# Altium PCB PCB1.PcbDoc (part 1 of 3)
Units mm, origin at the board's own origin, x right, y up, seen from the top; angles counter-clockwise.
Board outline 21.72 x 226.57 mm, 2 copper layers (Top Layer, Bottom Layer); 37 components, 26 nets, 124 pads, 11 vias.
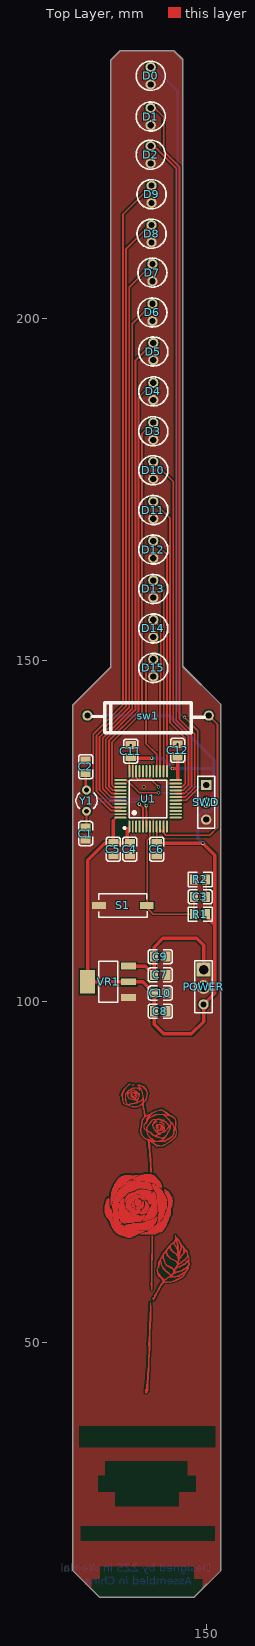
[diagram p0: Top Layer view]
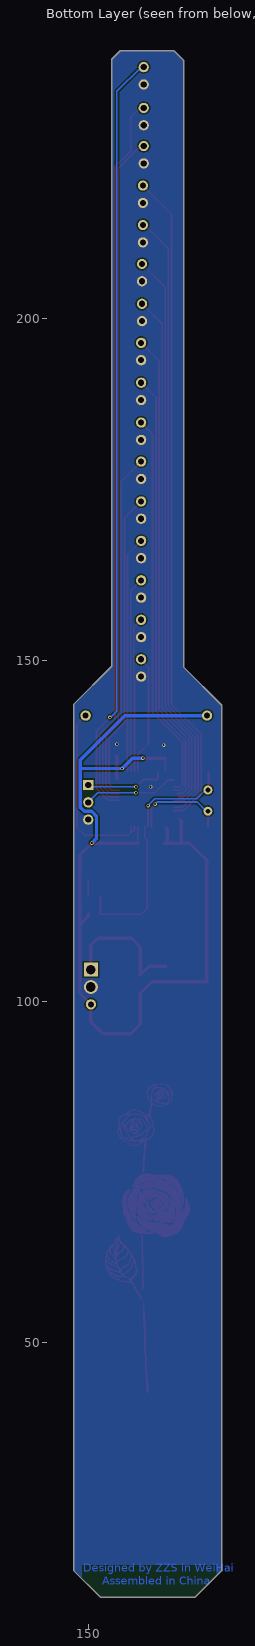
[diagram p1: Bottom Layer view, seen from below]

## Layer stack, top to bottom
Top Solder: solder mask 0.0102, Solder Resist, Dk 3.5
Top Layer: signal copper 0.0356
Dielectric 1: dielectric 0.32, FR-4, Dk 4.8
Bottom Layer: signal copper 0.0356
Bottom Solder: solder mask 0.0102, Solder Resist, Dk 3.5

## Board outline
130.429,16.637 130.429,143.383 136.017,148.971 136.017,237.871 137.414,239.268 145.288,239.268 146.558,237.998 146.558,149.098 152.146,143.51 152.146,16.637 148.209,12.7 134.366,12.7

## Design rules (kind name [scope] priority, off if disabled: settings)
Clearance [All] p1: gap=0.203
PolygonConnect [All] p1: connectstyle=Direct reliefconductorwidth=0.254 reliefentries=4 polygonreliefangle="90 Angle" airgapwidth=0.254
RoutingVias [All] p1: holewidth=0.305 width=0.508 viastyle="Through Hole" minholewidth=0.305 minwidth=0.508 maxholewidth=0.305 maxwidth=0.508
SolderMaskExpansion [All] p1: expansion=0.102
UnpouredPolygon [All] p1: allowunpoured=FALSE
Width [All] p1: maxlimit=0.508 minlimit=2539.975 preferedwidth=0.254 toplayer_minwidth=0 bottomlayer_minwidth=0 minimp=50.000000 maximp=50.000000 favimp=50.000000
29 further rules are at their usual default settings.

## Components (designator, comment, footprint, x,y, rotation, side; value= is the part's Value field where it differs from the comment)
C1 "20pF" 0805_C 132.334,124.587 r270 top
C2 "20pF" 0805_C 132.334,134.366 r90 top
C3 "100nF(104) 10% 50V" 0805_C 149.098,115.316 r0 top
C4 "104" 0805_C 138.811,122.301 r90 top
C5 "104" 0805_C 136.398,122.301 r90 top
C6 "104" 0805_C 142.748,122.301 r90 top
C7 "100nF" 0805_C 143.256,103.886 r180 top
C8 "100nF" 0805_C 143.256,98.552 r180 top
C9 "10uF" 0805_C 143.256,106.553 r0 top
C10 "10uF" 0805_C 143.256,101.219 r0 top
C11 "104" 0805_C 138.938,136.652 r270 top
C12 "104" 0805_C 145.796,136.779 r270 top
D0 "LED" PCBComponent_1 141.859,235.585 r90 top
D1 "LED" PCBComponent_1 141.859,229.616 r90 top
D2 "LED" PCBComponent_1 141.859,224.028 r90 top
D3 "LED" PCBComponent_1 142.24,183.515 r90 top
D4 "LED" PCBComponent_1 142.24,189.357 r90 top
D5 "LED" PCBComponent_1 142.24,195.199 r90 top
D6 "LED" PCBComponent_1 142.113,200.914 r90 top
D7 "LED" PCBComponent_1 142.113,206.756 r90 top
D8 "LED" PCBComponent_1 141.986,212.454 r90 top
D9 "LED" PCBComponent_1 141.986,218.237 r90 top
D10 "LED" PCBComponent_1 142.24,177.8 r90 top
D11 "LED" PCBComponent_1 142.24,171.975 r90 top
D12 "LED" PCBComponent_1 142.24,166.192 r90 top
D13 "LED" PCBComponent_1 142.24,160.409 r90 top
D14 "LED" PCBComponent_1 142.24,154.627 r90 top
D15 "LED" PCBComponent_1 142.24,148.844 r90 top
POWER "Header 3" HDR1X3#1 149.606,104.648 r270 top (schematic designator POWER1)
R1 "10KΩ (1002) ±1%" 0805_R 149.098,112.776 r180 top
R2 "100R" 0805_R 149.098,117.856 r0 top
S1 "SW-PB" KEY_3*6 137.795,114.046 r0 top
sw1 "SW" "PCBComponent_1 - duplicate" 141.478,141.859 r0 top
SWD "Header 3" HDR1X3#2 149.987,131.699 r270 top (schematic designator DOWNLOAD)
U1 "STM32F103C8T6" LQFP-48_7x7x05P 141.478,129.667 r0 top
VR1 "AMS1117-3.3" SOT-223 135.636,102.87 r0 top
Y1 "XTAL" BCY-W2/D3.1 132.461,129.413 r0 top

## Footprints (in the part's own frame and the unit in brackets; to place one, negate y for a bottom-side part, rotate by r counter-clockwise, add the part's x,y. Pads: shape width x height; smd on the part's side, far side on the other; paste and mask are expansions set on the pad)
0805_C [mm]
  rect 1.16x1.47 smd: 1(-0.89,0) 2(0.89,0)
  silkscreen extent -1.77,-1.04 1.77,1.04, body extent -1,-0.62 1,0.63, height 0.77
0805_R [mm]
  rect 1.16x1.47 smd: 1(-0.89,0) 2(0.89,0)
  silkscreen extent -1.77,-1.03 1.77,1.03, body extent -1,-0.62 1,0.63, height 0.49
BCY-W2/D3.1 [mm]
  round 1.3 hole 0.7: 1(0,1.55) 2(0,-1.55)
  silkscreen extent -1.55,-1.19 1.55,1.17
HDR1X3#1 [mil]
  rect 80x80 hole 55: 1(0,0)
  round 80 hole 55: 2(100,0)
  round 59.06 hole 35.43: 3(200,0)
  silkscreen extent -50,-50 250,50
HDR1X3#2 [mil]
  rect 59.06x59.06 hole 35.43: 1(0,0)
  round 59.06 hole 35.43: 2(100,0) 3(200,0)
  silkscreen extent -50,-50 250,50
KEY_3*6 [mm]
  rect 2x1 smd: 0(-3.5,0) 1(3.5,0)
  silkscreen extent -3.58,-1.75 3.56,1.75
LQFP-48_7x7x05P [mm]
  oval 0.28x1.8 smd mask+0.051: 1(-2.75,-4.05) 2(-2.25,-4.05) 3(-1.75,-4.05) 4(-1.25,-4.05) 5(-0.75,-4.05) 6(-0.25,-4.05) 7(0.25,-4.05) 8(0.75,-4.05) 9(1.25,-4.05) 10(1.75,-4.05) 11(2.25,-4.05) 12(2.75,-4.05) 25(2.75,4.05) 26(2.25,4.05) 27(1.75,4.05) 28(1.25,4.05) 29(0.75,4.05) 30(0.25,4.05) 31(-0.25,4.05) 32(-0.75,4.05) 33(-1.25,4.05) 34(-1.75,4.05) 35(-2.25,4.05) 36(-2.75,4.05)
  oval 1.8x0.28 smd mask+0.051: 13(4.05,-2.75) 14(4.05,-2.25) 15(4.05,-1.75) 16(4.05,-1.25) 17(4.05,-0.75) 18(4.05,-0.25) 19(4.05,0.25) 20(4.05,0.75) 21(4.05,1.25) 22(4.05,1.75) 23(4.05,2.25) 24(4.05,2.75) 37(-4.05,2.75) 38(-4.05,2.25) 39(-4.05,1.75) 40(-4.05,1.25) 41(-4.05,0.75) 42(-4.05,0.25) 43(-4.05,-0.25) 44(-4.05,-0.75) 45(-4.05,-1.25) 46(-4.05,-1.75) 47(-4.05,-2.25) 48(-4.05,-2.75)
  silkscreen extent -3.6,-4.42 2.75,2.75
PCBComponent_1 [mm]
  round 1.5 hole 0.9: 0(1.27,0) 1(-1.27,0)
  silkscreen extent -2.13,-2.13 2.13,2.13
"PCBComponent_1 - duplicate" [mm]
  round 1.5 hole 0.9: 2(8.89,0) 3(-8.89,0)
  silkscreen extent -8.13,-2.54 8.25,1.91
SOT-223 [mm]
  rect 2.2x1 smd: 1(3,-2.3) 2(3,0) 3(3,2.3)
  rect 2.2x3.5 smd: 2(-3,0)
  silkscreen extent -1.4,-3 1.4,3, body extent -3.49,-3.24 3.49,3.24, height 1.64

## Part data
C1 C2: library part "0805 20pF (200) 5% 50V", "贴片电容"
C3 C4 C5 C6 C7 C8 C11 C12: library part "0805 100nF(104) 10% 50V", "贴片电容"
C9 C10: library part 电解电容, "Capacitor"
POWER SWD: "Header, 3-Pin"
R1 R2: library part "0805 10KΩ (1002) 1%", "贴片电阻"
S1: "Switch"
U1: "ARM"
VR1: library part "SOT-223 AMS1117-3.3", "低压差线性稳压(LDO)"
Y1: "Crystal Oscillator"

## Via types
v1: diameter 0.508, hole 0.305, Top Layer to Bottom Layer, 11 vias

## Nets (pads, with @x,y where several pads share a name; then routed paths per layer and width w, separated by ;. In a path a pad name is that pad's centre, name@x,y a point inside that pad or via, vN(x,y) a via of type N, cw(c..) or ccw(c..) an arc to the next point about the centre after c; other vN are vias at no path point)
3.3v: C4.2 C5.2 C6.2 C8.2 C10.1 C11.2 C12.2 POWER.3 R1.1 sw1.3 U1.1 U1.9 U1.24 U1.36 U1.48 VR1.2 | length 148.4
  Top Layer w0.254: 136.398,126.492 U1.48@136.823,126.917 ; 138.43,125.319 U1.1@138.728,125.617 ; U1.36@138.728,133.717 C11.2@138.728,135.636 ; C6.2@142.728,123.211 U1.9@142.728,125.617 ; U1.24@145.528,132.417 145.796,132.685 ; v1(149.479,123.19) v1(149.479,123.19)
  Top Layer w0.508: 136.398,126.492 C5.2@136.398,123.191 ; 138.43,125.319 138.43,123.406 C4.2@138.645,123.191 ; C11.2@138.728,135.636 v1@141.757,135.636 ; C4.2@138.811,123.191 C4.2@138.645,123.191 ; C6.2@142.728,123.211 C6.2@142.748,123.191 v1(149.479,123.19) ; v1(145.034,134.112) 145.796,134.112 ; 145.796,132.685 145.796,134.112 ; C12.2@145.796,135.889 145.796,134.112 ; v1(149.479,123.19) 151.257,121.412 151.257,111.189 ; R1.1@149.988,112.776 149.988,112.458 151.257,111.189 ; C5.2@136.398,123.191 C4.2@138.645,123.191 ; C5.2@136.398,123.191 135.129,123.191 132.636,120.698 VR1.2@132.636,102.87 VR1.2@138.636,102.87 140.715,102.87 C10.1@142.366,101.219 C8.2@142.366,98.552 142.366,96.648 143.764,95.25 147.828,95.25 149.606,97.028 POWER.3@149.606,99.568 151.257,101.219 151.257,111.189
  Bottom Layer w0.508: sw1.3@132.588,141.859 144.653,141.859 151.194,135.318 151.194,128.461 150.559,127.826 149.487,127.826 148.78,127.119 148.78,123.889 v1(149.479,123.19) ; v1(141.986,135.636) 143.51,135.636 v1(145.034,134.112) 151.13,134.112
5V: C7.2 C9.1 POWER.1 VR1.3 | length 20.1
  Top Layer w0.508: VR1.3@138.636,105.17 141.082,105.17 C7.2@142.366,103.886 C9.1@142.366,106.553 142.366,107.949 143.637,109.22 148.59,109.22 149.606,108.204 POWER.1@149.606,104.648
GND: C1.2 C2.2 C4.1 C5.1 C6.1 C7.1 C8.1 C9.2 C10.2 C11.1 C12.1 D0.1 D1.1 D2.1 D3.1 D4.1 D5.1 D6.1 D7.1 D8.1 D9.1 D10.1 D11.1 D12.1 D13.1 D14.1 D15.1 POWER.2 R2.1 S1.0 SWD.3 U1.8 U1.23 U1.35 U1.44 U1.47 VR1.1
  other v1: 140.843,131.445 138.938,137.542 145.796,137.669
LED0: D0.0 U1.18 | length 112.6
  Top Layer w0.254: U1.18@145.528,129.417 145.558,129.447 147.069,129.447 148.768,131.146 148.768,139.649 v1(146.812,141.605) v1@146.685,141.605
  Bottom Layer w0.254: D0.0@142.24,236.855 145.796,233.299 145.796,142.494 146.685,141.605 v1(146.812,141.605)
LED1: D1.0 U1.19 | length 105.6
  Top Layer w0.254: D1.0@142.24,231.072 143.764,229.548 143.764,224.539 146.063,222.24 146.063,141.372 148.311,139.125 148.311,131.335 146.922,129.947 145.528,129.947 U1.19@145.528,129.917
LED2: D2.0 U1.20 | length 98.8
  Top Layer w0.254: D2.0@142.367,225.29 145.606,222.05 145.606,141.183 147.853,138.936 147.853,131.524 146.776,130.447 145.528,130.447 U1.20@145.528,130.417
LED3: D3.0 U1.39 | length 56.9
  Top Layer w0.254: U1.39@137.428,131.417 137.398,131.447 136.473,131.447 136.198,131.722 136.198,137.976 140.589,142.367 140.589,183.134 D3.0@142.24,184.785
LED4: D4.0 U1.40 | length 63.7
  Top Layer w0.254: U1.40@137.428,130.917 137.428,130.947 136.327,130.947 135.741,131.533 135.741,138.165 140.081,142.506 140.081,188.468 D4.0@142.24,190.627
LED5: D5.0 U1.41 | length 70.1
  Top Layer w0.254: U1.41@136.906,130.387 136.906,130.447 136.18,130.447 135.283,131.343 135.283,138.355 139.624,142.695 139.624,193.853 D5.0@142.24,196.469
LED6: D6.0 U1.42 | length 76.5
  Top Layer w0.254: U1.42@136.652,129.887 136.706,129.941 136.7,129.947 136.034,129.947 134.826,131.154 134.826,138.544 139.167,142.884 139.167,199.238 D6.0@142.113,202.184
LED7: D7.0 U1.43 | length 84
  Top Layer w0.254: U1.43@137.428,129.417 137.398,129.447 136.858,129.447 136.841,129.43 135.904,129.43 134.369,130.965 134.369,138.733 138.709,143.074 138.709,204.622 D7.0@142.113,208.026
LED8: D8.0 U1.45 | length 91
  Top Layer w0.254: U1.45@137.428,128.417 137.428,128.447 136.24,128.447 133.912,130.775 133.912,138.923 138.252,143.263 138.252,210.261 141.715,213.724 D8.0@141.986,213.724
LED9: D9.0 U1.46 | length 97.6
  Top Layer w0.254: U1.46@137.428,127.917 137.458,127.947 136.094,127.947 133.455,130.586 133.455,139.112 137.795,143.452 137.795,215.316 D9.0@141.986,219.507
LED10: D10.0 U1.21 | length 51.8
  Top Layer w0.254: D10.0@142.24,179.07 145.149,176.161 145.149,140.994 147.396,138.746 147.396,131.714 146.629,130.947 145.498,130.947 U1.21@145.528,130.917
LED11: D11.0 U1.22 | length 44.9
  Top Layer w0.254: D11.0@142.24,173.245 144.692,170.793 144.692,140.804 146.939,138.557 146.939,131.903 146.483,131.447 145.558,131.447 U1.22@145.528,131.417
LED12: D12.0 U1.25 | length 34.6
  Top Layer w0.254: D12.0@142.24,167.462 144.235,165.468 144.235,133.724 U1.25@144.228,133.717
LED13: D13.0 U1.26 | length 28.6
  Top Layer w0.254: D13.0@142.24,161.679 143.777,160.142 143.777,134.691 143.758,134.672 143.758,133.747 U1.26@143.728,133.717
LED14: D14.0 U1.27 | length 22.7
  Top Layer w0.254: D14.0@142.24,155.897 143.32,154.817 143.32,147.034 143.228,146.942 U1.27@143.228,133.717
LED15: D15.0 U1.28 | length 17.5
  Top Layer w0.254: D15.0@142.24,150.114 141.16,149.034 141.16,139.701 141.173,139.688 141.173,139.204 141.16,139.191 141.16,137.771 142.728,136.203 U1.28@142.728,133.717
NetC1_1: C1.1 U1.5 Y1.2 | length 14.4
  Top Layer w0.254: C1.1@132.334,125.477 132.461,125.604 Y1.2@132.461,127.863 ; v1(140.208,128.905) 140.208,128.867 140.728,128.347 U1.5@140.728,125.617
  Bottom Layer w0.254: Y1.2@132.461,127.863 132.689,127.863 134.036,129.21 139.903,129.21 v1(140.208,128.905)
NetC2_1: C2.1 U1.6 Y1.1 | length 15.4
  Top Layer w0.254: v1@141.224,128.715 v1(141.224,128.677) 141.224,127.833 141.228,127.829 U1.6@141.228,125.617
  Top Layer w0.381: C2.1@132.334,133.476 132.334,131.09 Y1.1@132.461,130.963
  Bottom Layer w0.254: Y1.1@132.461,130.963 132.816,130.963 134.112,129.667 140.272,129.667 141.224,128.715 v1(141.224,128.677)
NetC3_1: C3.1 R1.2 S1.1 U1.7 | length 21.9
  Top Layer w0.254: U1.7@141.728,125.617 141.728,123.998 141.351,123.621 141.351,114.102 S1.1@141.295,114.046 141.295,113.721 142.24,112.776 R1.2@148.208,112.776 C3.1@148.208,115.316
NetC3_2: C3.2 R2.2 | length 2.5
  Top Layer w0.254: C3.2@149.988,115.316 R2.2@149.988,117.856
Netsw1_2: sw1.2 U1.10 U1.11 | length 27.5
  Top Layer w0.254: U1.10@143.228,125.617 143.228,125.192 143.266,125.155 143.758,124.662 ; U1.11@143.728,125.617 143.758,125.587 143.758,124.662 ; sw1.2@150.368,141.859 151.638,140.589 151.638,125.476 150.495,124.333 144.087,124.333 143.758,124.662
SWDCLK: SWD.2 U1.37 | length 13.9
  Top Layer w0.254: U1.37@137.428,132.417 138.353,132.417 140.214,130.556 v1(143.002,130.556)
  Bottom Layer w0.254: v1(143.002,130.556) 148.59,130.556 SWD.2@149.987,129.159
SWDIO: SWD.1 U1.34 | length 11.5
  Top Layer w0.254: U1.34@139.728,133.717 139.728,133.3 139.758,133.27 139.758,132.762 140.033,132.487 141.96,132.487 v1(143.002,131.445)
  Bottom Layer w0.254: v1(143.002,131.445) 149.352,131.445 SWD.1@149.606,131.699
pads on no net: U1.2 U1.3 U1.4 U1.12 U1.13 U1.14 U1.15 U1.16 U1.17 U1.29 U1.30 U1.31 U1.32 U1.33 U1.38
copper on no net: | length 1065
  Top Layer w0: 141.021,71.196 142.697,71.196